# Altium PCB Powerjack_LED.PcbDoc
Units mil, origin at the board's own origin, x right, y up, seen from the top; angles counter-clockwise.
Board outline 750 x 750 mil, 2 copper layers (Top Layer, Bottom Layer); 4 components, 3 nets, 9 pads, 0 vias.
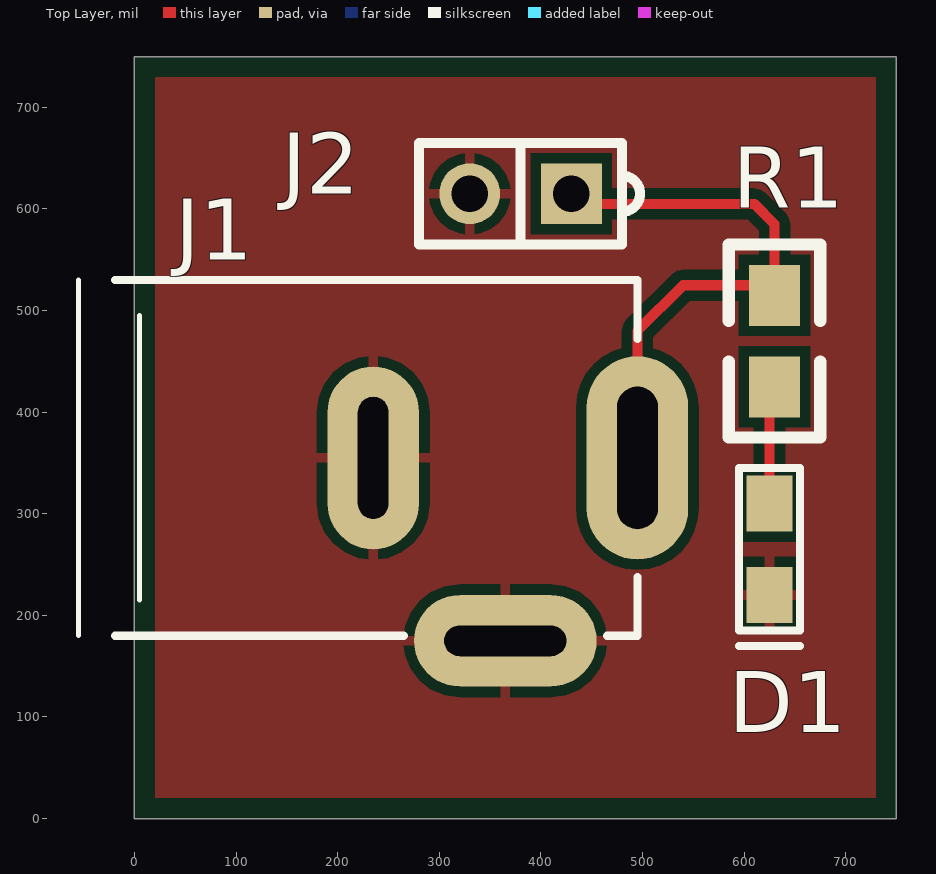
[diagram p0: Top Layer view]
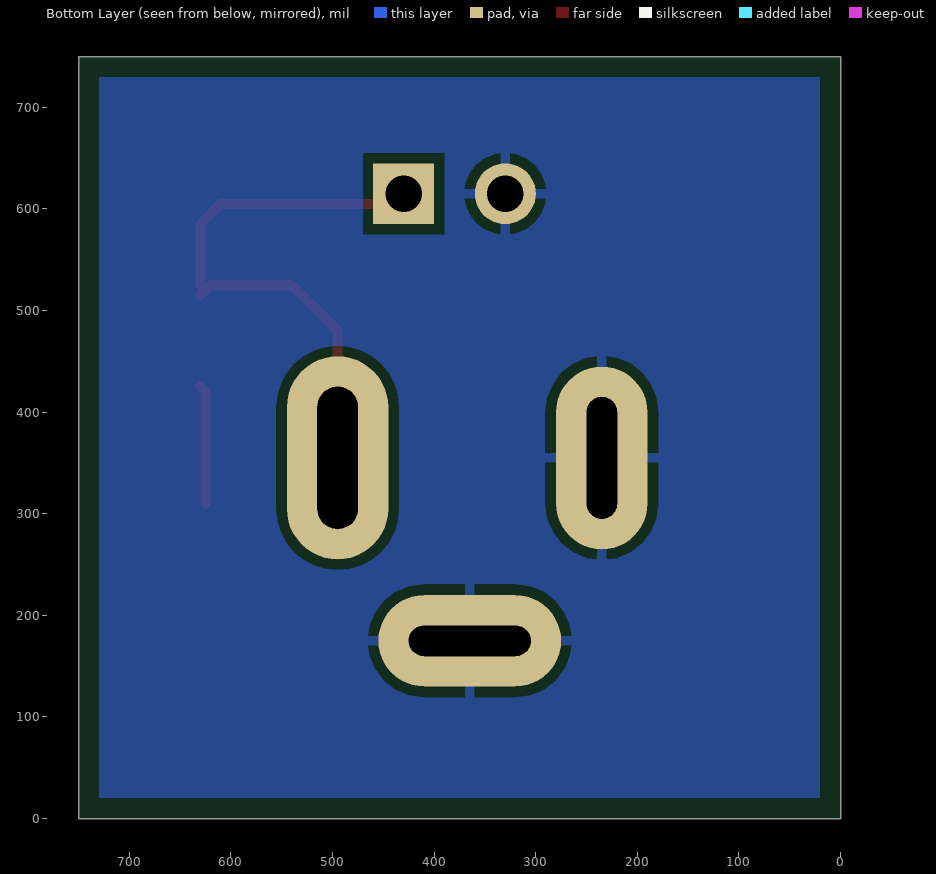
[diagram p1: Bottom Layer view, seen from below]

## Layer stack, top to bottom
Top Solder: solder mask 0.4, Solder Resist, Dk 3.5
Top Layer: signal copper 1.4
Dielectric 1: dielectric 12.6, FR-4, Dk 4.8
Bottom Layer: signal copper 1.4
Bottom Solder: solder mask 0.4, Solder Resist, Dk 3.5

## Board outline
0,0 0,750 750,750 750,0

## Design rules (kind name [scope] priority, off if disabled: settings)
BoardOutlineClearance [All] p1: gap=20 ignorepadtopadclearanceinfootprint=FALSE
Clearance [All] p1: gap=10 ignorepadtopadclearanceinfootprint=FALSE except(0: Arc-Hole Track-Hole SMDPad-Hole THPad-Hole Via-Hole Fill-Hole Poly-Hole Region-Hole Text-Hole)
PolygonConnect [All] p1: connectstyle=Relief reliefconductorwidth=10 reliefentries=4 polygonreliefangle="90 Angle" airgapwidth=10
RoutingVias [All] p1: holewidth=28 width=50 viastyle="Through Hole" minholewidth=28 minwidth=50 maxholewidth=28 maxwidth=50
SolderMaskExpansion [All] p1: expansion=4 istentingtop=FALSE
Width [All] p1: maxlimit=10 minlimit=10 preferedwidth=10
30 further rules are at their usual default settings.

## Components (designator, comment, footprint, x,y, rotation, side; value= is the part's Value field where it differs from the comment)
D1 "RED" LED-0805-RED 625,220 r90 top
J1 "CONN PWR" EJ508A 365,355 r0 top
J2 "HEADER 2" TSW-102-07-G-S 430,615 r180 top
R1 "1.00K" 0805-R 630,515 r270 top

## Footprints (in the part's own frame and the unit in brackets; to place one, negate y for a bottom-side part, rotate by r counter-clockwise, add the part's x,y. Pads: shape width x height; smd on the part's side, far side on the other; paste and mask are expansions set on the pad)
0805-R [mil] "0805 SMD Resistor"
  rect 60x50 smd: 1(0,0) 2(90,0)
  silkscreen extent -50,-45 140,45, body extent 0,-27 90,27, height 30
EJ508A [mil] "Power Jack"
  oval 100x200 hole 40 slot 140 at 90 deg: 1(130,0)
  oval 90x180 hole 30 slot 120 at 90 deg: 2(-130,0)
  oval 180x90 hole 30 slot 120 at 0 deg: 3(0,-180)
  silkscreen extent -420,-175 130,175, body extent -409,-193 158,177, height 433
LED-0805-RED [mil] "0805 SMD LED Red"
  rect 55x45 smd: A(90,0) K(0,0)
  silkscreen extent -50,-30 125,30, body extent -10,-20 100,20, height 41
TSW-102-07-G-S [mil] "CONN RCPT .100\" 2POS SNGL TIN"
  rect 60x60 hole 36: 1(0,0)
  round 60 hole 36: 2(100,0)
  silkscreen extent -68,-50 150,50

## Part data
D1: library part LTST-C191KRKT, "LED RED CLEAR 0805 SMD", Manufacturer="LITE-On Inc.", MANUFACTURER #=LTST-C171KRKT, Z9_MFR=Lite-On, A0_Text Field1=S03, BoardName=HV/COUNTER, ClassName=LEDS, COST=0.1183, COST (CT)=0.1183, DISTRIBUTOR=Digi-Key, DISTRIBUTOR #=160-1427-1-ND, DISTRIBUTOR # (CT)=160-1427-1-ND, Part_Number=LTST-C171KRKT, ST P#=LSMRED, Z9_MFR PN=LTST-C171KRKT, Z9_PRICE=0.1183, Z9_VENDOR=Digi-Key, Z9_VENDOR PN=160-1427-1-ND
J1: library part "CONN - BNC-EJ508A", "CONN PWR JACK 2.1X5.5MM SOLDER", Manufacturer="MPD (Memory Protection Devices)", MANUFACTURER #=EJ508A, Z9_MFR=MPD, A0_Text Field1=Y10, BoardName=COMM, COST=0.8944, COST (CT)=0.8944, DISTRIBUTOR=Digi-Key, DISTRIBUTOR #=EJ508A-ND, DISTRIBUTOR # (CT)=EJ508A-ND, HAND PLACED="HAND PLACED", Part_Number=EJ508A, ST P#=EC033, Z9_MFR PN=EJ508A, Z9_PRICE=0.7143, Z9_VENDOR=Digi-Key, Z9_VENDOR PN=EJ508A-ND
J2: library part TSW-102-07-G-S, "CONN HEADER 2POS .100\" SGL GOLD", Manufacturer="Samtec Inc.", Z9_MFR=Samtec, A0_Text Field1=Y08, Applications=-, BoardName=HV/COUNTER, ClassName=Room_U8, COST=0.6312, COST (CT)=0.6312, DISTRIBUTOR=Digi-Key, DISTRIBUTOR #=SAM1029-02-ND, DISTRIBUTOR # (CT)=SAM1029-02-ND, HAND PLACED="HAND PLACED", MANUFACTURER #=TSW-102-07-G-S, Part_Number=TSW-102-07-G-S, ST P#=EJ002, Z9_MFR PN=TSW-102-07-G-S, Z9_PRICE=0.685, Z9_VENDOR=Digi-Key
R1: library part "RES 1.00K 1P0 0805", "RES SMD 1K OHM 1% 1/8W 0805", Manufacturer=Yageo, MANUFACTURER #=RC0805FR-071KL, A0_Text Field1=B10, BoardName=HV/COUNTER, COST=0.0088, COST (CT)=0.0088, DISTRIBUTOR=Digi-Key, DISTRIBUTOR #=311-1.00KCRCT-ND, DISTRIBUTOR # (CT)=311-1.00KCRCT-ND, Part_Number=RC0805FR-071KL, ST P#=ASM1001, Z9_MFR=Yageo, Z9_MFR PN=RC0805FR-071KL, Z9_PRICE=0.0088, Z9_VENDOR=Digi-Key, Z9_VENDOR PN=311-1.00KCRCT-ND

## Nets (pads, with @x,y where several pads share a name; then routed paths per layer and width w, separated by ;. In a path a pad name is that pad's centre, name@x,y a point inside that pad or via, vN(x,y) a via of type N, cw(c..) or ccw(c..) an arc to the next point about the centre after c; other vN are vias at no path point)
GND: D1.K J1.2 J1.3 J2.2
NetD1_A: D1.A R1.2 | length 117.1
  Top Layer w10: D1.A 625,420 R1.2
NetJ1_1: J1.1 J2.1 R1.1 | length 562.3
  Top Layer w10: J2.1 440,605 610,605 630,585 630,525 R1.1@625,520 ; J1.1 495,480 540,525 620,525 R1.1@625,520 ; R1.1 R1.1@625,520

## Polygon pours and split planes (outlines as drawn)
no net on Bottom Layer "NONET_L-01_P-001" (solid, pour order 1): -20,750
GND on Bottom Layer "NONET_L-01_P-001" (solid, pour order 0): 0,0 750,0 750,750 0,750
GND on Top Layer "NONET_L-01_P-001" (solid, pour order 2): 0,0 750,0 750,750 0,750

## Silkscreen, mask and mechanical layers (free items; w line width, h text height)
Mechanical 1:
  the board outline again, w10

## Text inside footprints (layer, text, board x,y; h text height)
J1: Mechanical 6 "PT-SLOT" at 502.87,313.66 h15 r90; Mechanical 6 "PT-SLOT" at 241.89,311.69 h15 r90; Mechanical 6 "PT-SLOT" at 320.71,167.13 h15; Drill Drawing "PT-SLOT" at 502.87,313.66 h15 r90; Drill Drawing "PT-SLOT" at 241.89,311.69 h15 r90; Drill Drawing "PT-SLOT" at 320.71,167.13 h15